# EAGLE board 4xSplitter-ViasAround (EAGLE 8.7.1)
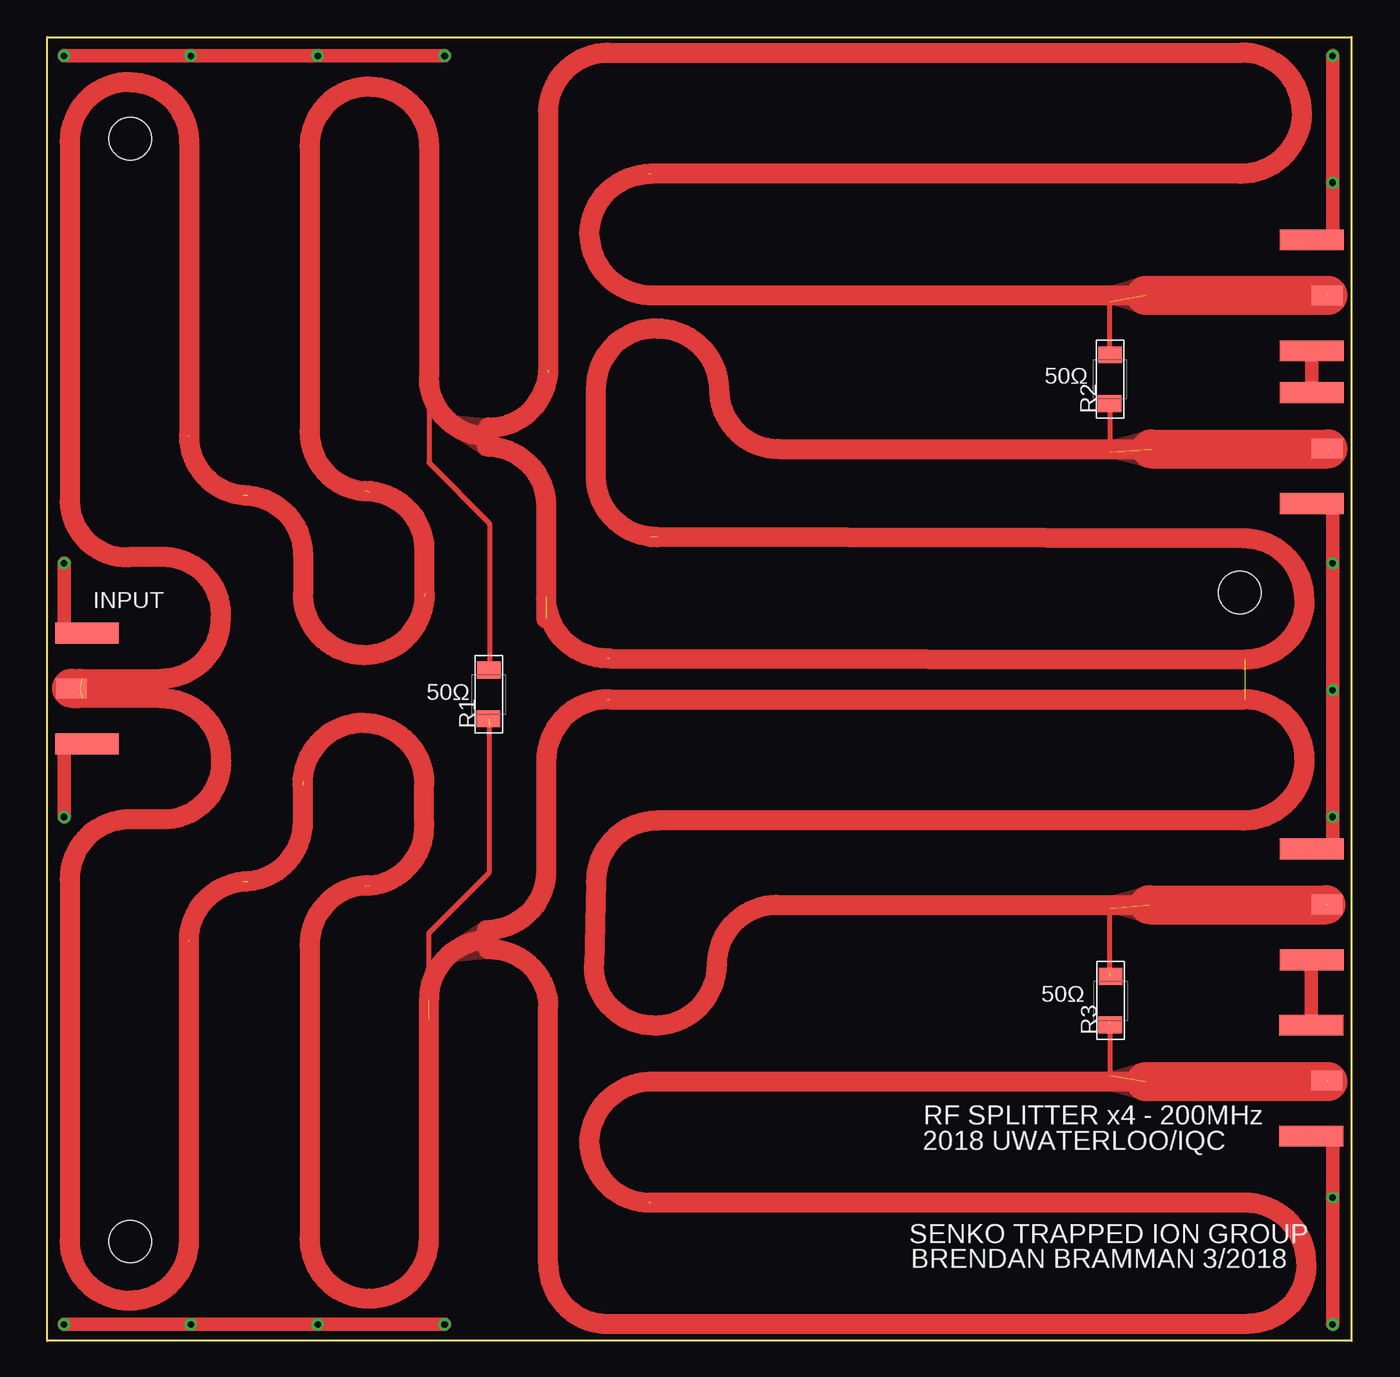
[diagram p0: board, top side]
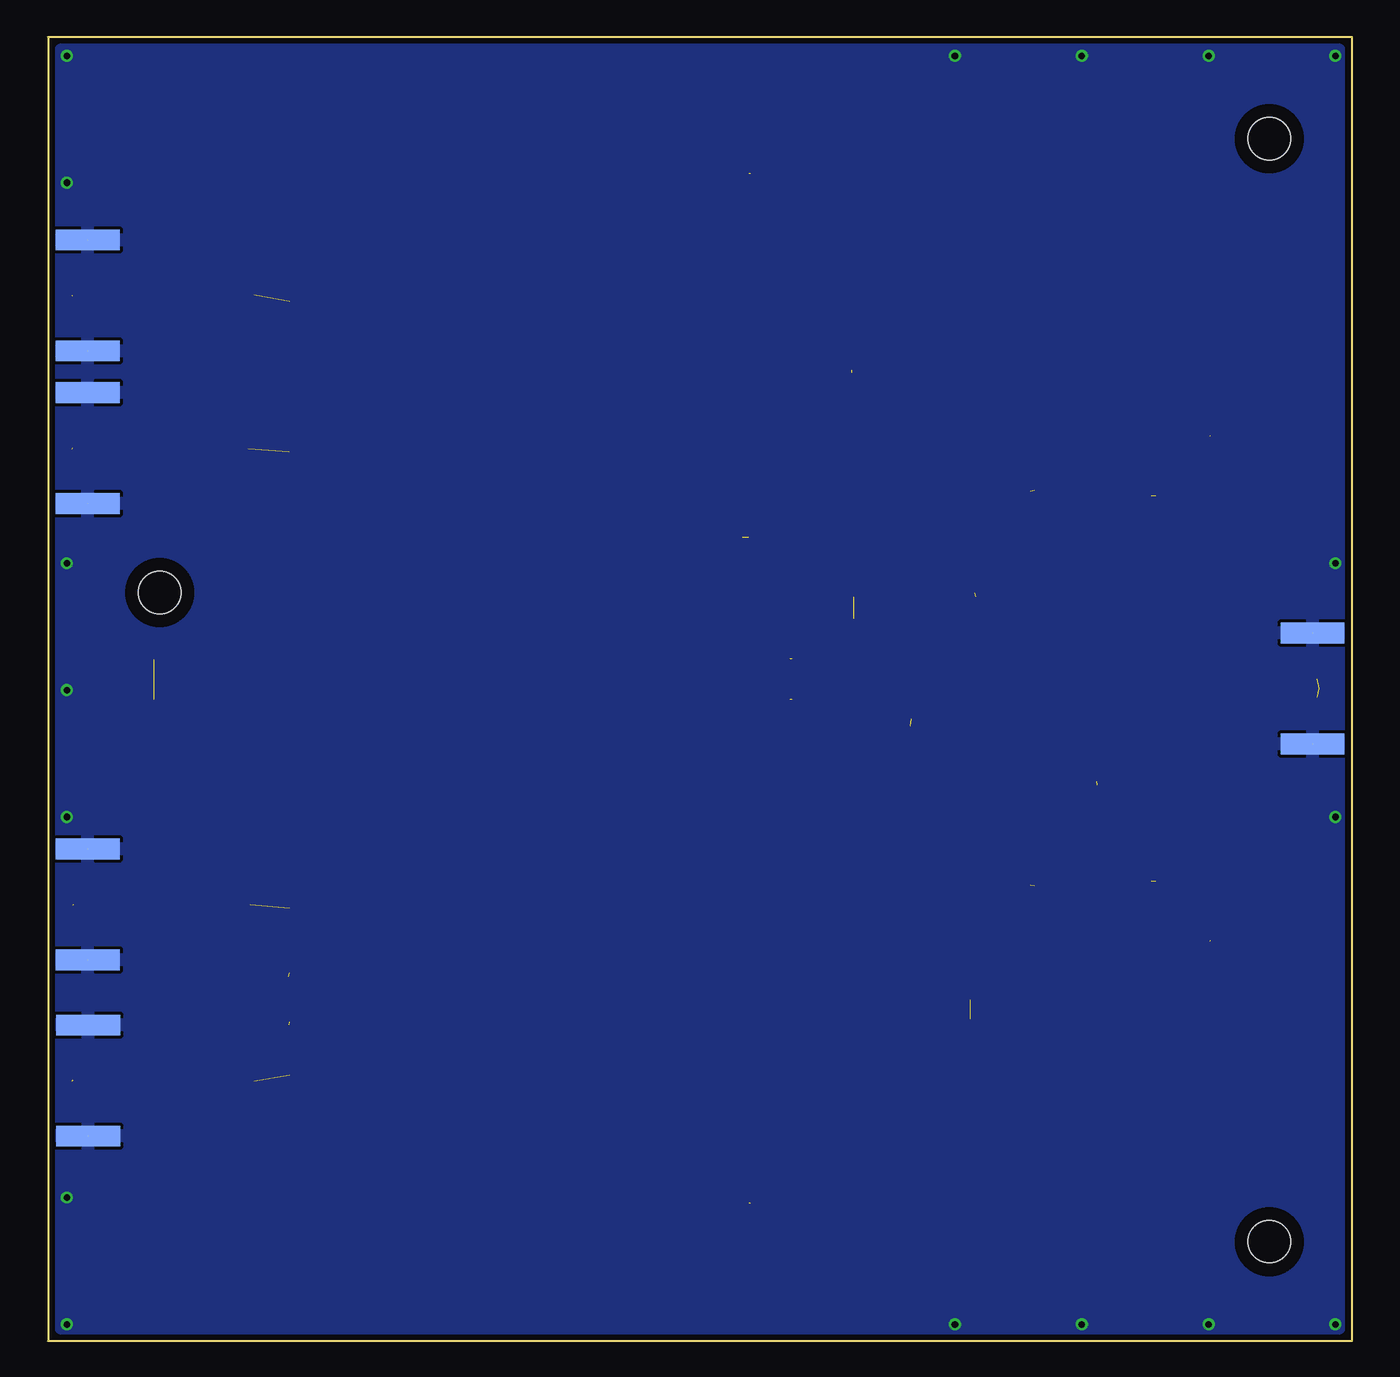
[diagram p1: board, bottom side, seen from below]

No outline drawn. Coordinates in mm, seen from the top.
Copper layers (1*16): Top 0.035mm / dielectric 1.5mm / Bottom 0.035mm
Design rules "default": minimum track width 6mil, minimum drill 0.35mm, track to track 6mil, track to pad 6mil, pad to pad 6mil, via to via 6mil, smd to smd 6mil, copper to edge 40mil, drill to drill 6mil, minimum pad ring 10mil, minimum via ring 8mil, stop-mask expansion 4mil, vias tented up to drill 0mil, thermal gap 10mil
Holes 3.26 mm at 6.35,7.62 91.44,57.4 6.35,92.2
Milling: 4 lines

## Footprints (pad centres in the part's own frame; a part is rotated, then mirrored left to right if it is on the bottom)
SMA-END = smd 1.6 x 4.902 bottom: P$2 -4.255,3.039; P$3 4.255,3.039 | smd 1.6 x 4.902: P$4 4.255,3.039; P$5 -4.255,3.039 | smd 1.499 x 2.362: SIGNAL 0,1.854
R1206 = smd 1.295 x 1.803: P$1 -1.854,0.025; P$2 1.88,0

## Placement (x,y rotation side)
J1  SMA-END  [SMA-END]  -0.01,50.05 270 top
J2  SMA-END  [SMA-END]  100,80.18 90 top
J3  SMA-END  [SMA-END]  99.99,68.46 90 top
J4  SMA-END  [SMA-END]  99.97,19.97 90 top
J5  SMA-END  [SMA-END]  99.98,33.49 90 top
R1  100 - Ohm  [R1206]  33.85,49.57 90 top
R2  100 - Ohm  [R1206]  81.48,73.74 90 top
R3  100 - Ohm  [R1206]  81.53,26.09 90 top

## Library data of the parts
J1-J5 = lib; PARTNUM: ACX1911-ND
R1-R3 = lib; POWER: 1W; SIZE: 1206; TOLERANCE: 1%

## Nets
GROUND: J1.P$2 J1.P$3 J1.P$4 J1.P$5 J2.P$2 J2.P$3 J2.P$4 J2.P$5 J3.P$2 J3.P$3 J3.P$4 J3.P$5 J4.P$2 J4.P$3 J4.P$4 J4.P$5 J5.P$2 J5.P$3 J5.P$4 J5.P$5
N$1: J1.SIGNAL J2.SIGNAL J3.SIGNAL J4.SIGNAL J5.SIGNAL R1.P$1 R1.P$2 R2.P$1 R2.P$2 R3.P$1 R3.P$2

## Tracks (layer width: path | path; a pad name or v marks a point on that pad's centre or on a via)
GROUND  (via drill 0.51)  (8 unrouted)
  Top 1.016: v1.27,98.55 v30.45,98.55 | v1.27,59.64 1.27,54.43 1.3,54.4 | v1.27,40.18 1.27,45.58 1.2,45.65 | v1.27,1.27 v30.45,1.27 | v98.55,1.27 98.55,15.5 98.8,15.75 | J4.P$3 96.93,29.23 J5.P$2 | 98.6,37.85 98.55,37.9 v98.55,40.18 98.55,63.8 98.6,63.85 | J3.P$3 96.95,75.92 J2.P$2 | v98.55,98.55 98.55,84.3 98.5,84.25
  other vias: 98.55,49.91 11,1.27 20.73,1.27 98.55,11 98.55,59.64 98.55,88.82 20.73,98.55 11,98.55
  pour Bottom: 1,1 1,99 99,99 99,1
N$1  (29 unrouted)
  Top 0.381: R2.P$2 81.48,79.72 | R2.P$1 81.48,68.17 arc90 81.5,68.15 | 81.48,24.48 81.48,20.38 | 81.48,28.21 81.48,33.18 | 29.25,73.95 29.25,67.35 33.9,62.7 33.9,51.5 R1.P$2 | 29.25,24.7 29.25,31.3 33.9,35.95 33.9,47.15
  Top 1.537: 2.65,50.76 8.7,50.8 arc90 13.3,55.35 arc90 9.25,60.1 6.25,60.1 arc-90 1.7,64.35 1.7,92 arc-90 6.3,96.55 arc-90 10.85,91.95 10.85,69.4 | 15.05,64.85 arc-90 19.6,60.25 19.6,57.3 arc90 24.3,52.6 arc90 28.95,57.35 | 24.35,65.2 arc-90 28.9,60.6 28.9,57.1 | 24.65,65.15 arc-90 20.1,69.75 20.1,91.65 arc-90 24.7,96.2 arc-90 29.25,91.6 29.25,73.95 arc90 33.8,69.35 | 33.8,70.05 arc90 38.4,74.45 | 33.7,68.6 arc-90 38.25,64 38.25,55.4 | 38.4,74.25 38.4,94.2 arc-90 42.95,98.8 91.65,98.8 arc-90 96.2,94.2 arc-90 91.5,89.5 46.15,89.5 | 46.25,89.5 arc90 41.55,84.8 arc90 46.6,80.2 84.2,80.2 | 42.95,52.35 arc-90 38.25,57.05 | 43.1,52.35 91.85,52.25 arc90 96.4,56.85 arc90 91.7,61.55 46.3,61.65 | 46.75,61.65 arc-90 42.05,66.35 42.05,73.1 arc-90 46.65,77.65 arc-90 51.5,73 arc90 56.05,68.4 84.65,68.4 | 10.85,69.45 arc90 15.4,64.85 | 2.65,49.34 8.7,49.3 arc-90 13.3,44.75 arc-90 9.25,40 6.25,40 arc90 1.7,35.4 1.7,7.65 arc90 6.3,3.1 arc90 10.85,7.7 10.85,30.7 | 15.05,35.25 arc90 19.6,39.85 | 24.35,34.9 arc90 28.9,39.5 | 24.65,34.95 arc90 20.1,30.35 20.1,7.8 arc90 24.7,3.25 arc90 29.25,7.85 29.25,26.15 arc-90 33.8,30.75 | 33.8,30.05 arc-90 38.4,25.65 38.4,5.9 arc90 42.95,1.3 92,1.3 arc90 96.55,5.9 arc90 91.85,10.6 46.15,10.6 | 33.7,31.5 arc90 38.25,36.1 38.25,44.5 arc-90 42.95,49.2 | 46.25,10.6 arc-90 41.55,15.3 arc-90 46.6,19.9 84.2,19.9 | 43.1,49.2 91.85,49.2 arc-90 96.4,44.6 arc-90 91.7,39.9 46.75,39.9 arc90 42.05,35.2 41.9,28.75 arc90 46.5,24.2 arc90 51.35,28.85 arc-90 55.9,33.45 84.5,33.45 | 10.85,30.65 arc-90 15.4,35.25
  Top 2.985: 84.65,68.4 98.2,68.4 | J1.SIGNAL 2.5,50.05 | 84.2,80.2 98.2,80.2 | 84.5,33.45 98.05,33.45 | 84.2,19.9 98.2,19.9
  pour Top: 30.45,70.9 34.55,70.55 34.25,69.3 34.4,67.95 33.4,68.05 30.75,69.8
  pour Top: 30.45,29.2 34.55,29.55 34.25,30.8 34.4,32.15 33.4,32.05 30.75,30.3
  pour Top: 81.28,80.77 83.69,81.53 83.69,78.87 81.28,79.63
  pour Top: 81.41,34.04 84.07,34.8 84.07,32.13 81.41,32.89
  pour Top: 81.05,20.47 83.72,21.23 83.72,18.57 81.05,19.33
  pour Top: 81.28,68.96 84.2,69.72 84.2,67.06 81.28,67.82
N$4  (1 unrouted)
  Top 1.537: 19.55,42.65 arc-90 24.2,47.4 arc-90 28.9,42.7 28.9,39.75 | 19.6,39.4 19.6,42.9

## Text on the board
tPlace: 50Ω | INPUT | 50Ω | 50Ω | RF SPLITTER x4 - 200MHz | 2018 UWATERLOO/IQC | SENKO TRAPPED ION GROUP | BRENDAN BRAMMAN 3/2018